# Altium PCB board2.PcbDoc
Units mm, origin at the board's own origin, x right, y up, seen from the top; angles counter-clockwise.
Board outline 65.53 x 63.88 mm, 2 copper layers (Top Layer, Bottom Layer), stack 1.66 mm thick; 40 components, 45 nets, 272 pads, 86 vias.
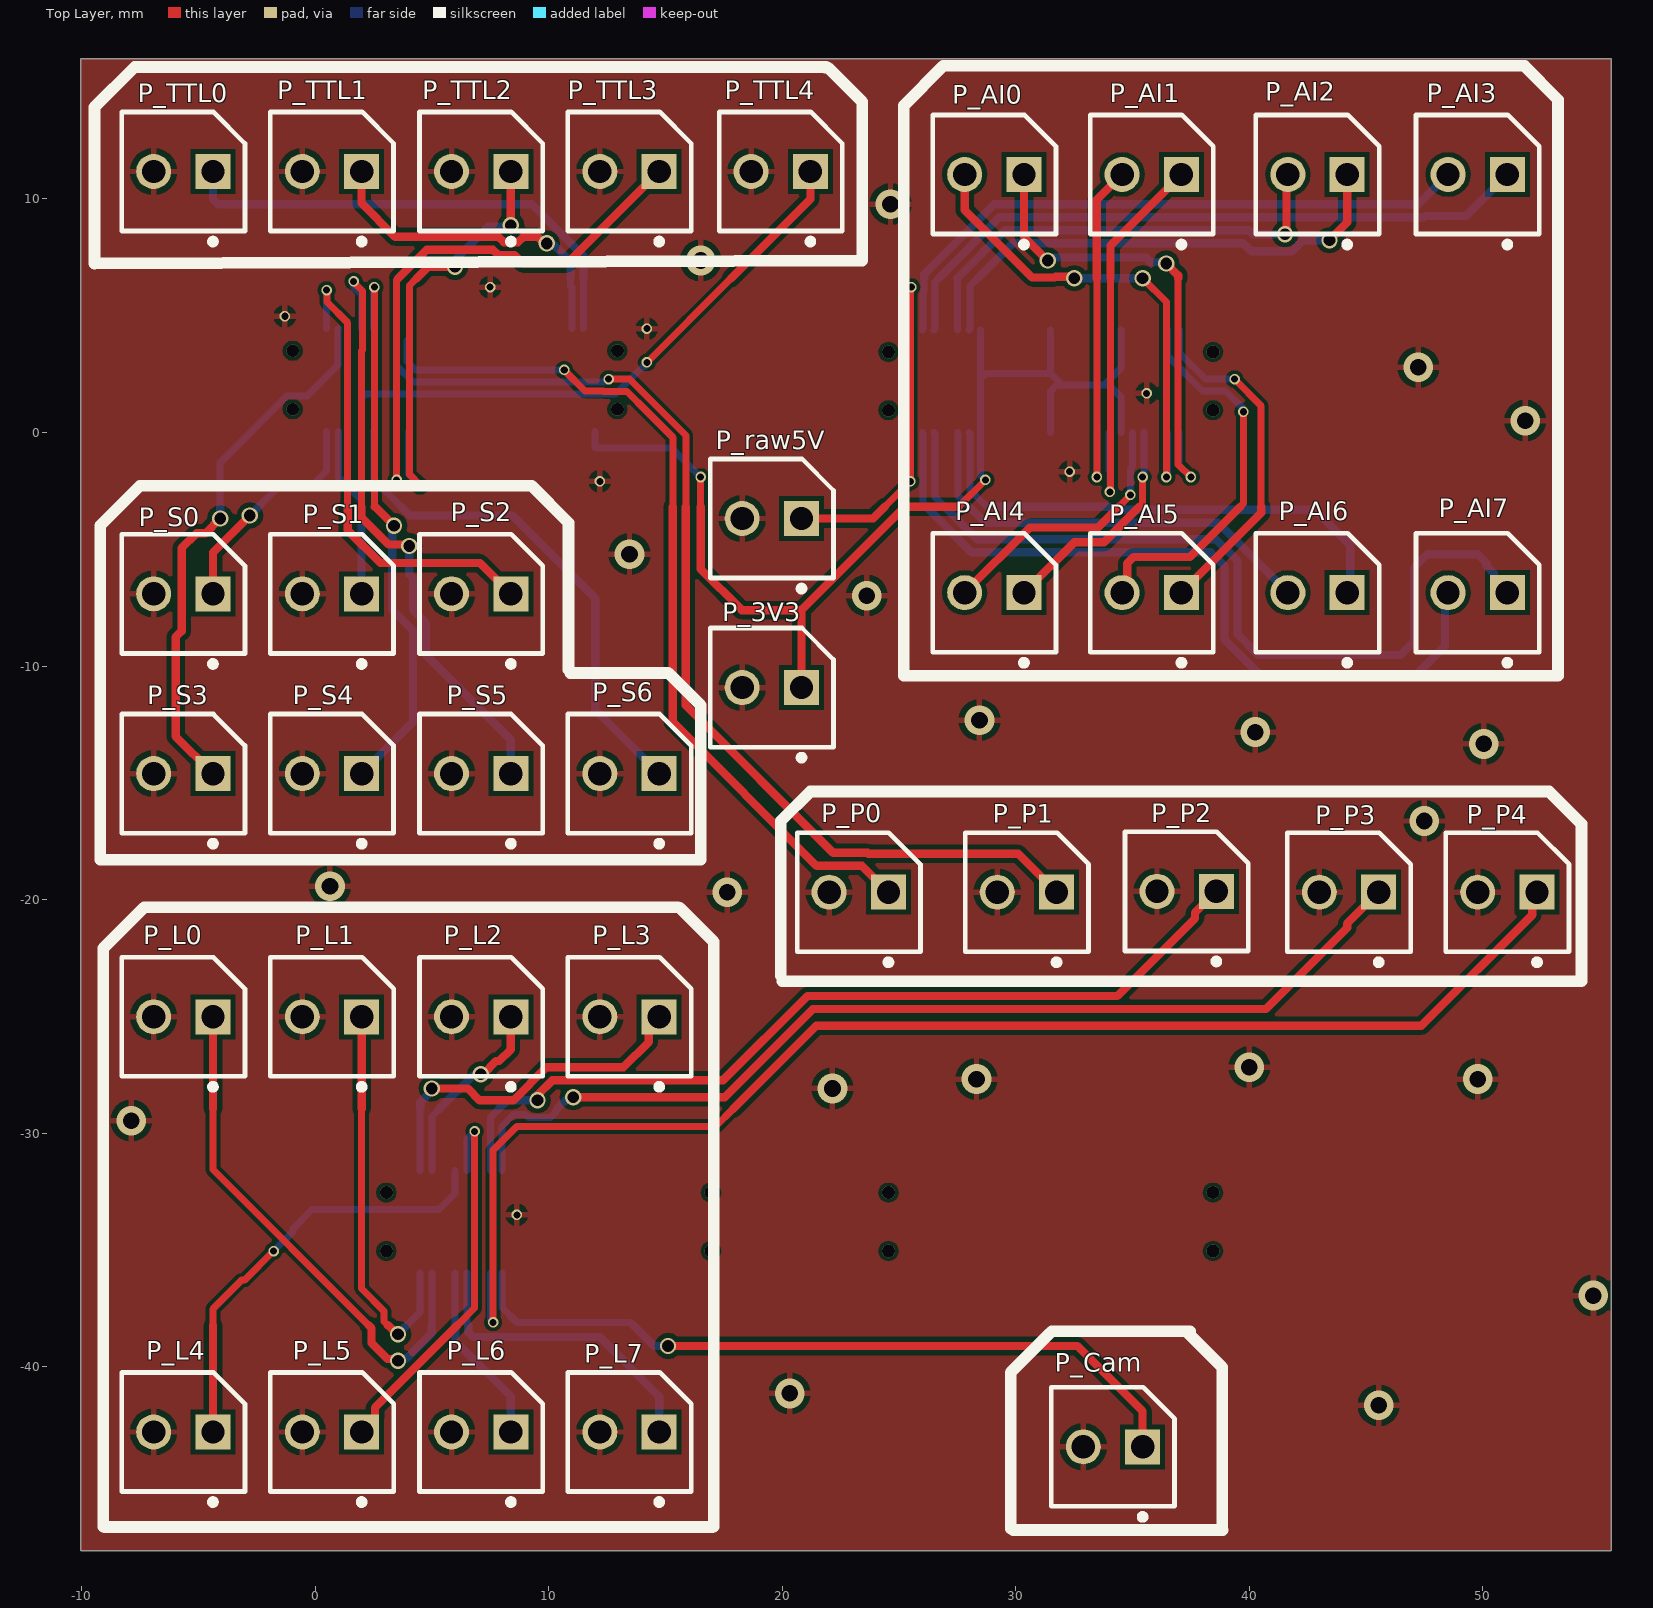
[diagram p0: Top Layer view]
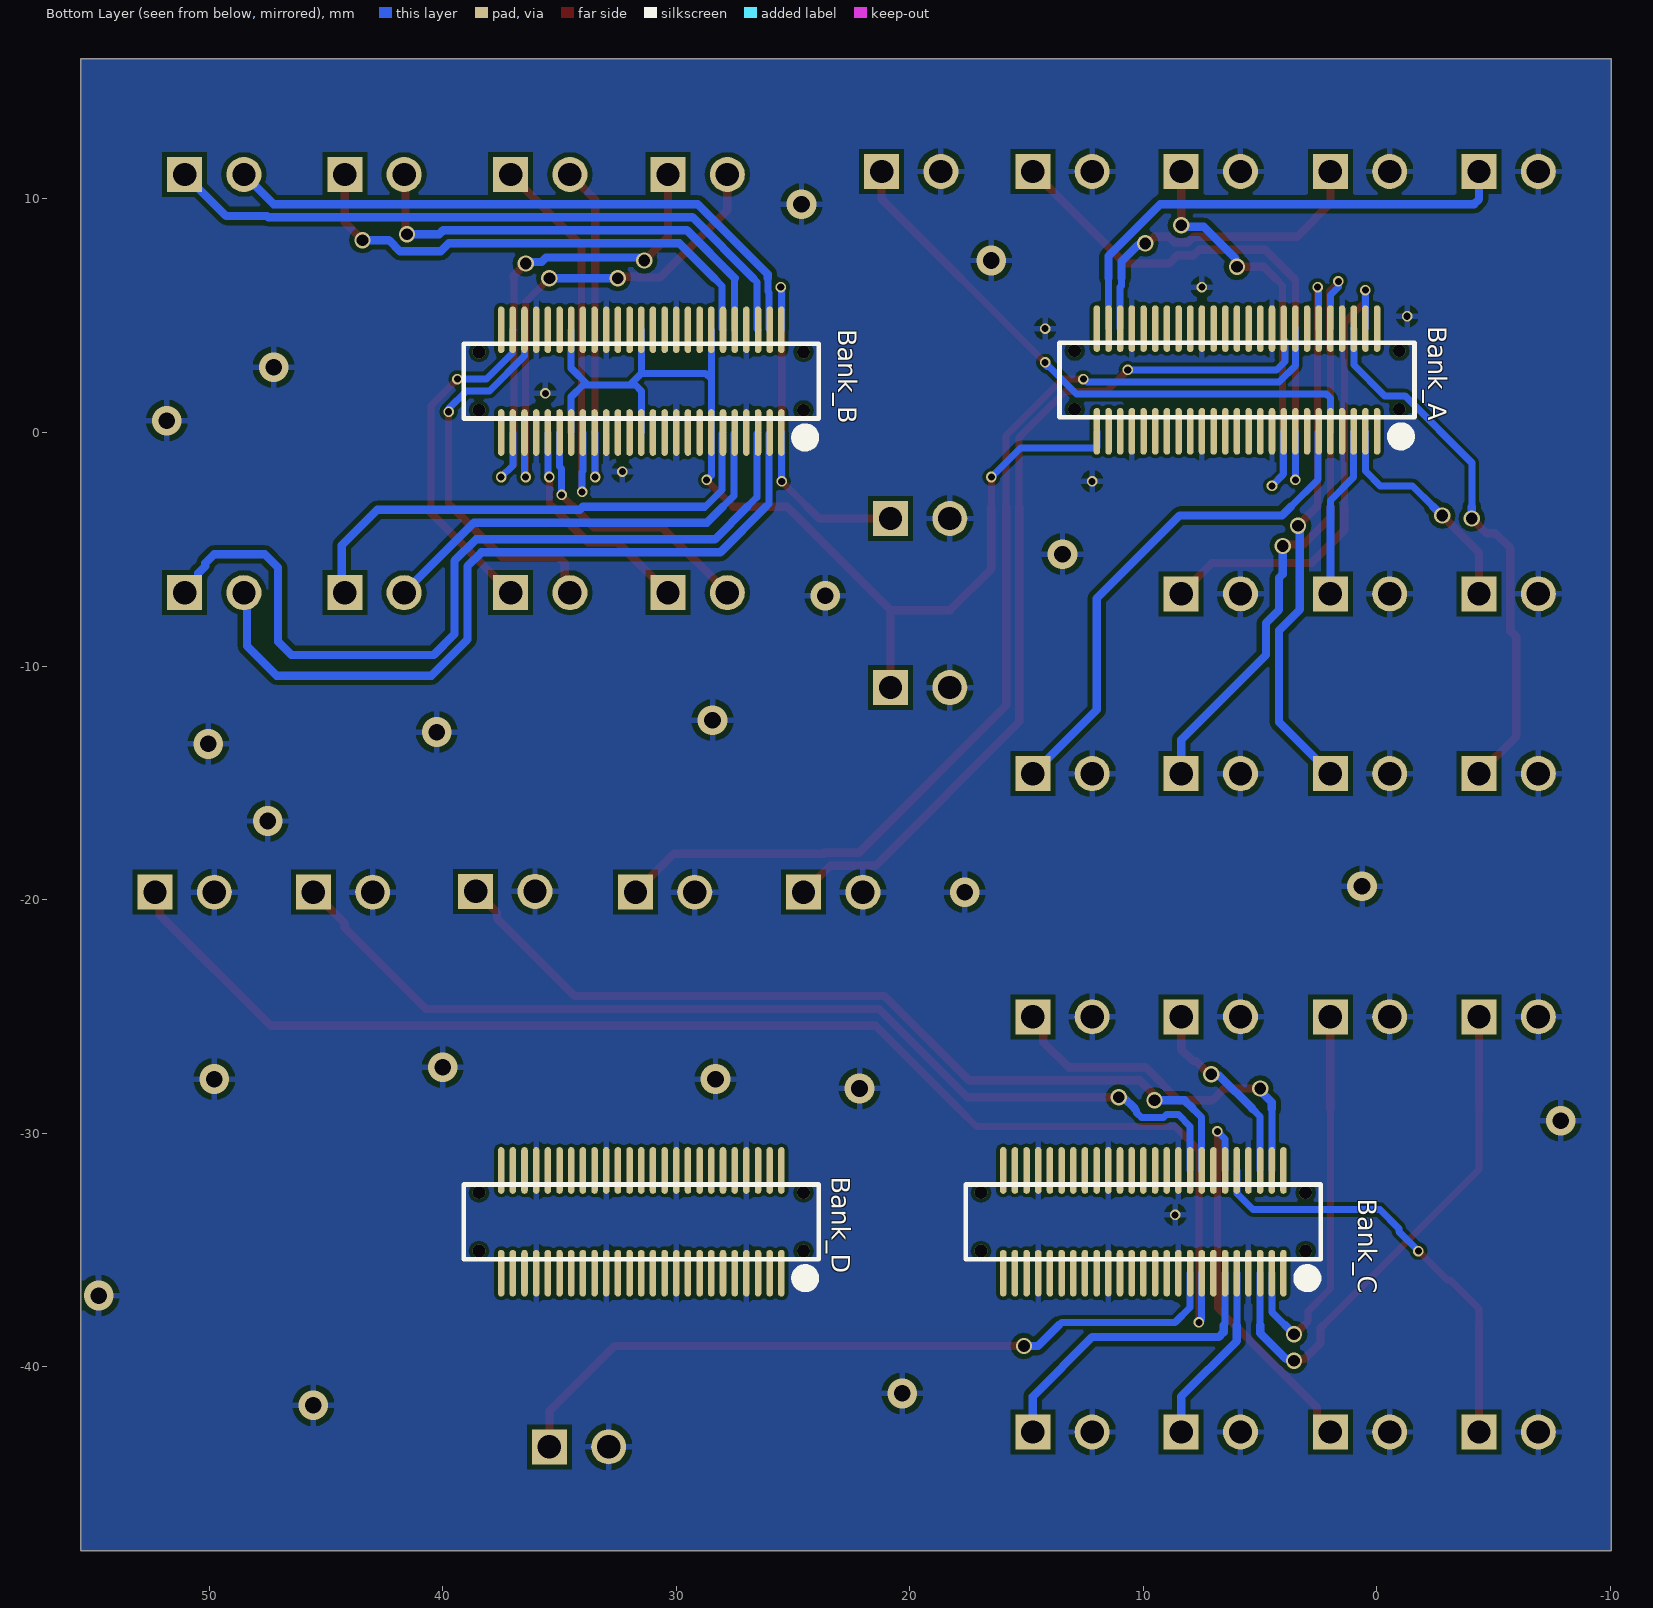
[diagram p1: Bottom Layer view, seen from below]
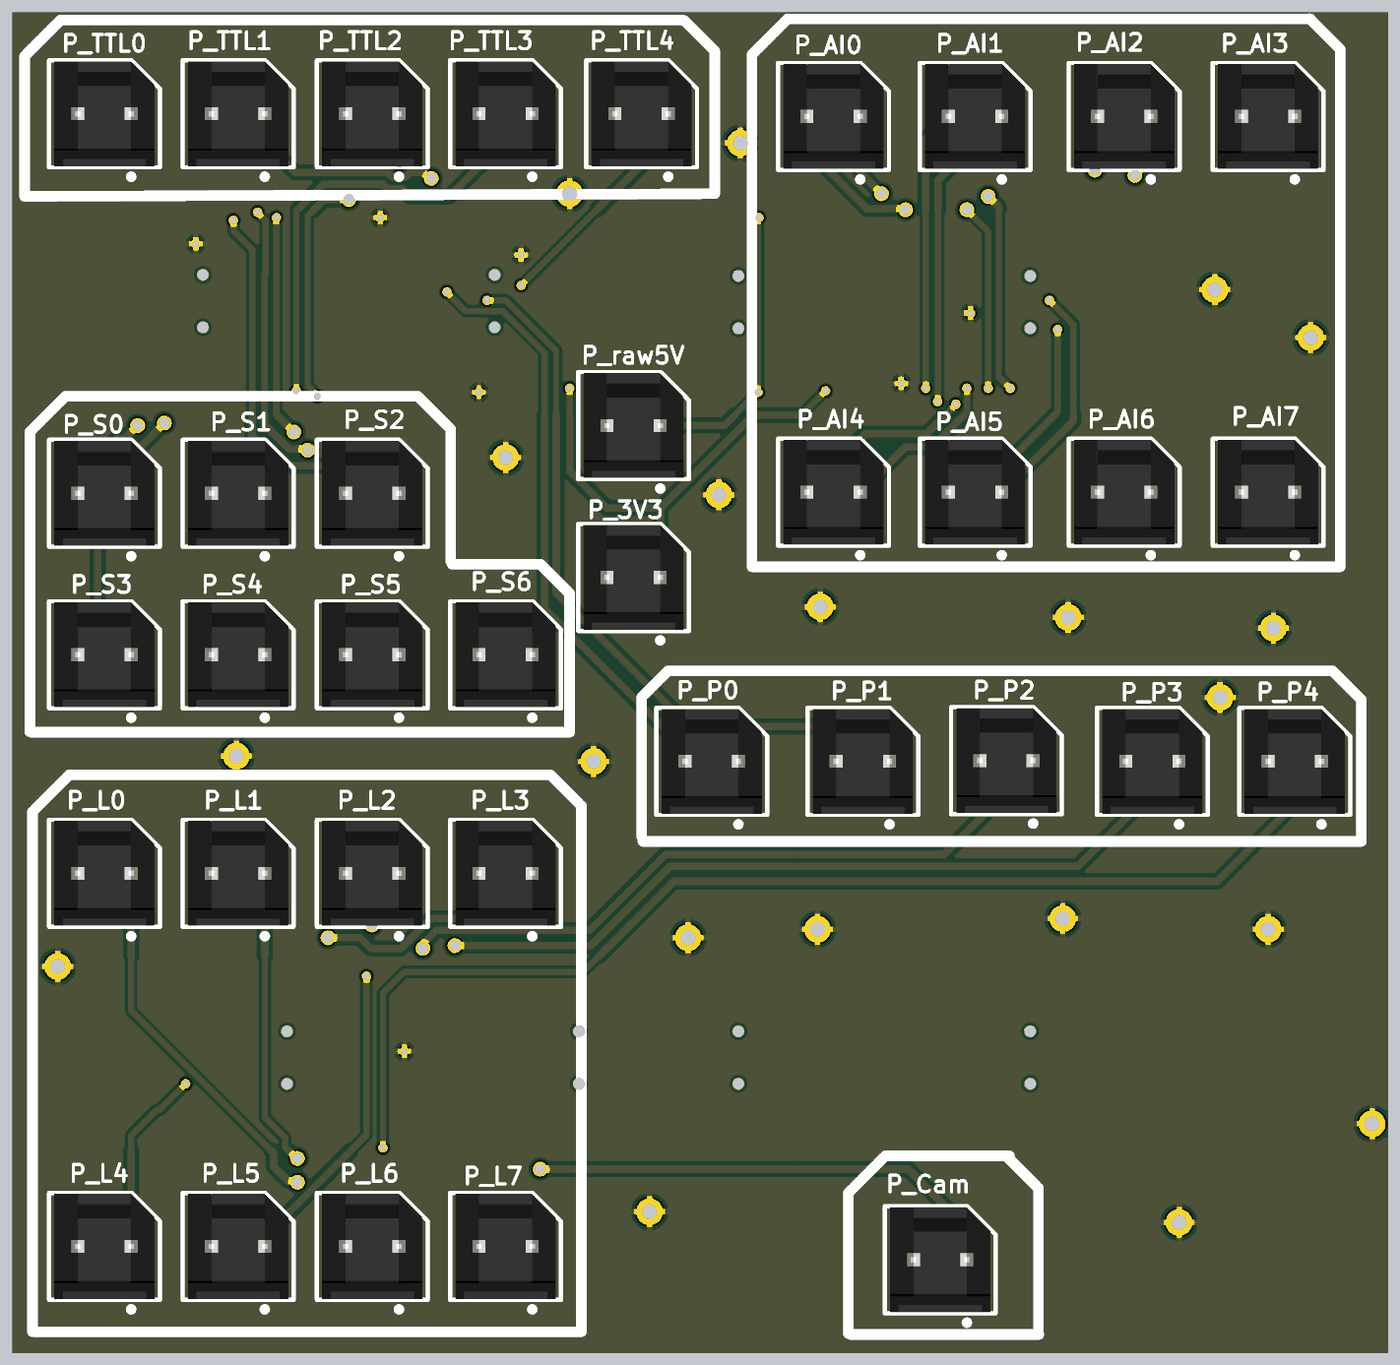
[diagram p2: 3D render of the assembled board from above, using the file's embedded part models]

## Layer stack, top to bottom
Top Solder: solder mask 0.0102, Solder Resist, Dk 3.5
Top Layer: signal copper 0.055
Dielectric1: dielectric 1.55, FR-4, Dk 4.8
Bottom Layer: signal copper 0.055
Bottom Solder: solder mask 0.0102, Solder Resist, Dk 3.5

## Board outline
-10.033,-47.879 -10.033,16.002 55.499,16.002 55.499,-47.879

## Design rules (kind name [scope] priority, off if disabled: settings)
Clearance clearance_polygons [InNamedPolygon('top_gnd_power')or InNamedPolygon('bottom_gnd_power') vs InNamedPolygon('top_gnd_uc')or InNamedPolygon('bottom_gnd_uc')] p1: gap=1.5 ignorepadtopadclearanceinfootprint=FALSE except(0: Arc-Hole Track-Hole SMDPad-Hole THPad-Hole Via-Hole Fill-Hole Poly-Hole Region-Hole Text-Hole)
Clearance ClearanceRoom [WithinRoom('less')  or WithinRoom('less1') or WithinRoom('less2') or WithinRoom('less3') or WithinRoom('less4')] p2: gap=0.15 ignorepadtopadclearanceinfootprint=FALSE
Clearance clearance_HP_class [InNetClass('high_power_net')] p3: gap=0.381 ignorepadtopadclearanceinfootprint=FALSE except(0: Arc-Hole Track-Hole SMDPad-Hole THPad-Hole Via-Hole Fill-Hole Poly-Hole Region-Hole Text-Hole)
Clearance "clearance_24V class" [InNetClass('24V_net')] p4: gap=0.254 ignorepadtopadclearanceinfootprint=FALSE except(0: Arc-Hole Track-Hole SMDPad-Hole THPad-Hole Via-Hole Fill-Hole Poly-Hole Region-Hole Text-Hole)
Clearance Clearance_1 [All] p5: gap=0.203 ignorepadtopadclearanceinfootprint=FALSE
FabricationTestPointUsage TestPointUsage [All] p1: valid=0 allowmultiple=FALSE
FabricationTestpoint Testpoint [All] p1: side=3 testpointundercomponent=TRUE minsize=1.016 maxsize=2.54 preferedsize=1.524 minholesize=0 maxholesize=1.016 preferedholesize=0.813 testpointgrid=0.025 allowsidetop=TRUE allowsidebottom=TRUE usegrid=TRUE gridtolerance=0
HoleSize [All] p1: absolutevalues=TRUE maxlimit=6 minlimit=0.025 maxpercent=80.000 minpercent=20.000
PolygonConnect PolygonConnect_Power [(InNet('+5V') OR InNet('-24VBUS'))] p1: connectstyle=Relief reliefconductorwidth=2.54 reliefentries=4 polygonreliefangle="90 Angle" airgapwidth=0.254
PolygonConnect [All] p2: connectstyle=Relief reliefconductorwidth=0.254 reliefentries=4 polygonreliefangle="90 Angle" airgapwidth=0.254
RoomDefinition less1 [False] p1: confinementstyle=ConfineIn formatcopy=TRUE lockcomponents=FALSE outline -6.731,-28.956 49.403,-28.956 49.403,-38.227 -6.731,-38.227
RoomDefinition less [False] p2: confinementstyle=ConfineIn formatcopy=TRUE lockcomponents=FALSE outline -8.763,6.604 45.593,6.604 45.593,-3.175 -8.763,-3.175
RoutingVias ViasRoom [WithinRoom('less')  or WithinRoom('less1') or WithinRoom('less2') or WithinRoom('less3') or WithinRoom('less4')] p1: holewidth=0.3 width=0.45 viastyle="Through Hole" minholewidth=0.3 minwidth=0.45 maxholewidth=0.3 maxwidth=0.45
RoutingVias [All] p2: holewidth=0.5 width=0.7 viastyle="Through Hole" minholewidth=0.3 minwidth=0.5 maxholewidth=0.711 maxwidth=1.27
SilkToSolderMaskClearance SilkscreenOverComponentPads [IsPad] p1: minsilkscreentomaskgap=0.254 clearancetoexposedcopper=TRUE
SolderMaskExpansion [All] p1: expansion=0.102 istentingtop=FALSE
Width WidthRoom [WithinRoom('less')  or WithinRoom('less1') or WithinRoom('less2') or WithinRoom('less3') or WithinRoom('less4')] p1: maxlimit=0.3 minlimit=0.3 preferedwidth=0.3
Width Width_HC_class [InNetClass('High_Current_net')] p2: maxlimit=15.24 minlimit=1.524 preferedwidth=1.524
Width Width_HP_class [InNetClass('High_Power_net')] p3: maxlimit=1.016 minlimit=1.016 preferedwidth=1.016
Width "Width_24V class" [InNetClass('24V_net')] p4: maxlimit=0.762 minlimit=0.762 preferedwidth=0.762
Width Width_1 [All] p5: maxlimit=0.356 minlimit=0.356 preferedwidth=0.356
26 further rules are at their usual default settings.

## Classes and differential pairs
component class Sheet1: Bank_C Bank_D P_Cam P_L0 P_L1 P_L2 P_L3 P_L4 P_L5 P_L6 P_L7 P_P2 P_P3 P_P4
component class sheet_top: Bank_A Bank_B P_3V3 P_AI0 P_AI1 P_AI2 P_AI3 P_AI4 P_AI5 P_AI6 P_AI7 P_P0 P_P1 P_raw5V P_S0 P_S1 P_S2 P_S3 P_S4 P_S5 P_S6 P_TTL0 P_TTL1 P_TTL2 P_TTL3 P_TTL4

## Components (designator, comment, footprint, x,y, rotation, side; value= is the part's Value field where it differs from the comment)
Bank_A "16890" SSOP50P500X600-50N 5.991,2.249 r270 bottom locked
Bank_B "16890" SSOP50P500X600-50N 31.5,2.2 r270 bottom locked
Bank_C "16890" SSOP50P500X600-50N 10,-33.8 r270 bottom locked
Bank_D "16890" SSOP50P500X600-50N 31.5,-33.8 r270 bottom locked
P_3V3 "66100211622" 66100211622 20.828,-10.922 r0 top
P_AI0 "66100211622" 66100211622 30.353,11.049 r0 top
P_AI1 "66100211622" 66100211622 37.096,11.049 r0 top
P_AI2 "66100211622" 66100211622 44.196,11.049 r0 top
P_AI3 "66100211622" 66100211622 51.054,11.049 r0 top
P_AI4 "66100211622" 66100211622 30.353,-6.858 r0 top
P_AI5 "66100211622" 66100211622 37.096,-6.858 r0 top
P_AI6 "66100211622" 66100211622 44.196,-6.858 r0 top
P_AI7 "66100211622" 66100211622 51.054,-6.858 r0 top
P_Cam "66100211622" 66100211622 35.433,-43.434 r0 top
P_L0 "66100211622" 66100211622 -4.375,-25.019 r0 top
P_L1 "66100211622" 66100211622 1.991,-25.019 r0 top
P_L2 "66100211622" 66100211622 8.382,-25.019 r0 top
P_L3 "66100211622" 66100211622 14.732,-25.019 r0 top
P_L4 "66100211622" 66100211622 -4.375,-42.799 r0 top
P_L5 "66100211622" 66100211622 1.991,-42.799 r0 top
P_L6 "66100211622" 66100211622 8.382,-42.799 r0 top
P_L7 "66100211622" 66100211622 14.732,-42.799 r0 top
P_P0 "66100211622" 66100211622 24.55,-19.685 r0 top
P_P1 "66100211622" 66100211622 31.75,-19.685 r0 top
P_P2 "66100211622" 66100211622 38.59,-19.65 r0 top
P_P3 "66100211622" 66100211622 45.54,-19.685 r0 top
P_P4 "66100211622" 66100211622 52.324,-19.685 r0 top
P_raw5V "66100211622" 66100211622 20.828,-3.683 r0 top
P_S0 "66100211622" 66100211622 -4.375,-6.91 r0 top
P_S1 "66100211622" 66100211622 1.99,-6.91 r0 top
P_S2 "66100211622" 66100211622 8.382,-6.91 r0 top
P_S3 "66100211622" 66100211622 -4.375,-14.605 r0 top
P_S4 "66100211622" 66100211622 1.99,-14.605 r0 top
P_S5 "66100211622" 66100211622 8.382,-14.605 r0 top
P_S6 "66100211622" 66100211622 14.732,-14.605 r0 top
P_TTL0 "66100211622" 66100211622 -4.375,11.176 r0 top
P_TTL1 "66100211622" 66100211622 1.99,11.176 r0 top
P_TTL2 "66100211622" 66100211622 8.382,11.176 r0 top
P_TTL3 "66100211622" 66100211622 14.732,11.176 r0 top
P_TTL4 "66100211622" 66100211622 21.209,11.176 r0 top

## Footprints (in the part's own frame and the unit in brackets; to place one, negate y for a bottom-side part, rotate by r counter-clockwise, add the part's x,y. Pads: shape width x height; smd on the part's side, far side on the other; paste and mask are expansions set on the pad)
66100211622 [mm] "2 Pins, stehend 2.54mm Intercom Stiftleiste WR-WTB"
  rect 1.5x1.5 hole 1: 1(0,0)
  round 1.5 hole 1: 2(-2.54,0)
  silkscreen extent -3.91,-3.12 1.37,2.55, body extent -3.66,-2.5 1.12,2.5, height 11.33
SSOP50P500X600-50N [mm] "SSOP, 50-Leads, Body 15,20x4,00mm, Pitch 0,50mm, IPC Medium Density"
  oval 2x0.28 smd: 1(2.2,6) 2(2.2,5.5) 3(2.2,5) 4(2.2,4.5) 5(2.2,4) 6(2.2,3.5) 7(2.2,3) 8(2.2,2.5) 9(2.2,2) 10(2.2,1.5) 11(2.2,1) 12(2.2,0.5) 13(2.2,0) 14(2.2,-0.5) 15(2.2,-1) 16(2.2,-1.5) 17(2.2,-2) 18(2.2,-2.5) 19(2.2,-3) 20(2.2,-3.5) 21(2.2,-4) 22(2.2,-4.5) 23(2.2,-5) 24(2.2,-5.5) 25(2.2,-6) 26(-2.2,-6) 27(-2.2,-5.5) 28(-2.2,-5) 29(-2.2,-4.5) 30(-2.2,-4) 31(-2.2,-3.5) 32(-2.2,-3) 33(-2.2,-2.5) 34(-2.2,-2) 35(-2.2,-1.5) 36(-2.2,-1) 37(-2.2,-0.5) 38(-2.2,0) 39(-2.2,0.5) 40(-2.2,1) 41(-2.2,1.5) 42(-2.2,2) 43(-2.2,2.5) 44(-2.2,3) 45(-2.2,3.5) 46(-2.2,4) 47(-2.2,4.5) 48(-2.2,5) 49(-2.2,5.5) 50(-2.2,6)
  silkscreen extent -1.6,-7.6 2.71,7.6, body extent -2,-6.48 2,6.48, height 6

## Part data
Bank_A Bank_B Bank_C Bank_D: library part CMP-00541-6, "Board to Board Double Slot Femal 50 PIN", Manufacturer=Sparkfun, PartNumber=PRT-16890
P_3V3 P_AI0 P_AI1 P_AI2 P_AI3 P_AI4 P_AI5 P_AI6 P_AI7 P_Cam P_L0 P_L1 P_L2 P_L3 P_L4 P_L5 P_L6 P_L7 P_P0 P_P1 P_P2 P_P3 P_P4 P_raw5V P_S0 P_S1 P_S2 P_S3 P_S4 P_S5 P_S6 P_TTL0 P_TTL1 P_TTL2 P_TTL3 P_TTL4: library part CMP-001-0161-A.3, "WR-WTB 2.54 mm Male Vertical Shrouded Header 2 Pins", Manufacturer="Wurth Electronics", Supplier Part Number=732-14102-ND, PartNumber=66100211622, Supplier=Digi-Key

## Via types
v1: diameter 0.45, hole 0.3, Top Layer to Bottom Layer, 30 vias
v2: diameter 0.7, hole 0.5, Top Layer to Bottom Layer, 20 vias
v3: diameter 1.27, hole 0.711, Top Layer to Bottom Layer, 20 vias
v4: diameter 0.55/0.55 (per signal layer), hole 0.55, Top Layer to Bottom Layer, 16 vias

## Nets (pads, with @x,y where several pads share a name; then routed paths per layer and width w, separated by ;. In a path a pad name is that pad's centre, name@x,y a point inside that pad or via, vN(x,y) a via of type N, cw(c..) or ccw(c..) an arc to the next point about the centre after c; other vN are vias at no path point)
+3V3: Bank_A.25 Bank_B.7 Bank_B.13 Bank_B.19 Bank_B.32 Bank_B.38 Bank_B.44 P_3V3.1 | length 49.7
  Top Layer w0.3: 16.51,-3.175 v1(16.51,-1.905) ; 27.559,-3.175 v1(28.702,-2.032)
  Top Layer w0.356: 16.51,-3.175 16.51,-5.842 18.275,-7.607 20.828,-7.607 ; P_3V3.1 20.828,-7.607 ; 27.559,-3.175 25.26,-3.175 20.828,-7.607
  Bottom Layer w0.3: Bank_A.25 11.991,-0.651 12.001,-0.661 15.266,-0.661 v1(16.51,-1.905) ; Bank_B.44 28.5,2.286 ; v1(28.702,-2.032) 28.5,-1.83 Bank_B.7 28.5,2.286 ; Bank_B.13 31.5,1.782 31.75,2.032 32,2.032 ; Bank_B.38 31.5,2.532 ; Bank_B.19 34.5,1.532 34,2.032 33.782,2.032 ; Bank_B.32 34.5,2.75 33.782,2.032 ; 28.5,2.286 28.746,2.532 31.5,2.532 ; 31.5,2.532 32,2.032 ; 32,2.032 33.782,2.032
+5V: Bank_B.1 Bank_B.50 P_raw5V.1 | length 17.6
  Top Layer w0.3: 24.403,-3.175 v1(25.484,-2.094) 25.484,6.14 25.527,6.183 v1(25.527,6.223)
  Top Layer w0.356: P_raw5V.1 23.895,-3.683 24.403,-3.175
  Bottom Layer w0.3: v1(25.484,-2.094) 25.492,-2.086 Bank_B.1@25.492,-0.85 ; Bank_B.1@25.5,-0.85 Bank_B.1 ; Bank_B.50 25.5,6.196 v1(25.527,6.223)
GND: Bank_A.4 Bank_A.10 Bank_A.16 Bank_A.22 Bank_A.29 Bank_A.35 Bank_A.41 Bank_A.47 Bank_B.4 Bank_B.10 Bank_B.16 Bank_B.22 Bank_B.29 Bank_B.35 Bank_B.41 Bank_B.47 Bank_C.4 Bank_C.10 Bank_C.16 Bank_C.22 Bank_C.29 Bank_C.35 Bank_C.41 Bank_C.47 Bank_D.4 Bank_D.10 Bank_D.16 Bank_D.22 Bank_D.29 Bank_D.35 Bank_D.41 Bank_D.47 P_3V3.2 P_Cam.2 P_L0.2 P_L1.2 P_L2.2 P_L3.2 P_L4.2 P_L5.2 P_L6.2 P_L7.2 P_P0.2 P_P1.2 P_P2.2 P_P3.2 P_P4.2 P_raw5V.2 P_S0.2 P_S1.2 P_S2.2 P_S3.2 P_S4.2 P_S5.2 P_S6.2 P_TTL0.2 P_TTL1.2 P_TTL2.2 P_TTL3.2 P_TTL4.2
  other v1: 8.636,-33.503 12.192,-2.094 32.309,-1.676 35.611,1.676 14.207,4.449 -1.295,4.978 7.491,6.223
  other v3: 45.54,-41.656 20.32,-41.148 54.737,-36.957 -7.874,-29.464 22.153,-28.088 28.321,-27.686 49.784,-27.686 40.005,-27.178 17.653,-19.685 0.635,-19.431 47.498,-16.637 50.038,-13.335 40.259,-12.827 28.448,-12.319 23.622,-6.985 13.462,-5.207 51.816,0.508 47.244,2.794 16.51,7.366 24.638,9.779
NetBank_A_2: Bank_A.2 P_S0.1 | length 9.8
  Top Layer w0.356: P_S0.1 -4.375,-5.137 v2(-2.794,-3.556)
  Bottom Layer w0.3: -2.413,-3.175 -1.524,-2.286 -0.144,-2.286 0.491,-1.651 Bank_A.2
  Bottom Layer w0.356: v2(-2.794,-3.556) -2.413,-3.175
NetBank_A_3: Bank_A.3 P_S1.1 | length 7.4
  Bottom Layer w0.3: Bank_A.3 0.991,-1.913 1.99,-2.912 1.99,-3.175
  Bottom Layer w0.356: P_S1.1 1.99,-3.175
NetBank_A_5: Bank_A.5 P_TTL4.1 | length 25.4
  Top Layer w0.3: v1(14.207,3) 17.81,6.604
  Top Layer w0.356: 17.81,6.604 21.209,10.003 P_TTL4.1
  Bottom Layer w0.3: Bank_A.5 1.991,1.475 2.167,1.651 12.857,1.651 v1@14.083,2.877 ; v1@14.132,2.829 14.132,2.885 14.207,2.96 v1(14.207,3)
NetBank_A_6: Bank_A.6 P_S6.1 | length 22.3
  Bottom Layer w0.3: Bank_A.6 2.529,0.011 2.529,-2.021 3.683,-3.175
  Bottom Layer w0.356: 3.683,-3.175 4.064,-3.556 8.444,-3.556 12,-7.112 12,-11.873 P_S6.1
NetBank_A_8: Bank_A.8 P_TTL3.1 | length 24.3
  Top Layer w0.3: v1(3.491,-2.032) 3.491,6.539 3.556,6.604
  Top Layer w0.356: 3.556,6.604 4.775,7.823 7.617,7.823 7.848,7.592 8.537,7.592 8.89,7.239 10.795,7.239 P_TTL3.1
  Bottom Layer w0.3: v1(3.491,-2.032) Bank_A.8
NetBank_A_9: Bank_A.9 P_TTL2.1 | length 19.2
  Top Layer w0.3: 4.346,6.604 4.033,6.291 4.033,-1.789 4.491,-2.247 v1(4.491,-2.286)
  Top Layer w0.356: 4.346,6.604 4.834,7.092 v2(5.991,7.092) ; v2(8.382,8.882) P_TTL2.1
  Bottom Layer w0.3: Bank_A.9 3.991,-1.786 v1(4.491,-2.286)
  Bottom Layer w0.356: v2(5.991,7.092) 6.057,7.158 6.057,7.454 7.419,8.816 8.316,8.816 v2(8.382,8.882)
NetBank_A_27: Bank_A.27 P_TTL0.1 | length 21.2
  Bottom Layer w0.3: Bank_A.27 11.491,6.604
  Bottom Layer w0.356: P_TTL0.1 -4.375,9.987 -4.167,9.779 9.271,9.779 11.491,7.559 11.491,6.604
NetBank_A_28: Bank_A.28 P_TTL1.1 | length 14.4
  Top Layer w0.356: P_TTL1.1 1.99,9.821 3.429,8.382 7.848,8.382 8.079,8.151 8.685,8.151 8.916,8.382 9.541,8.382 9.826,8.097 v2(9.919,8.097)
  Bottom Layer w0.3: 10.932,6.604 10.932,6.285 10.991,6.226 Bank_A.28
  Bottom Layer w0.356: v2(9.919,8.097) 9.985,8.031 10.229,8.031 10.932,7.328 10.932,6.604
NetBank_A_42: Bank_A.42 P_P0.1 | length 38.1
  Top Layer w0.3: v1(10.668,2.684) 10.668,2.667 11.557,1.778 12.339,1.778 12.356,1.761 13.351,1.761 14.244,0.868 15.316,-0.205 15.316,-3.175
  Top Layer w0.356: 15.316,-3.175 15.316,-12.395 21.475,-18.554 23.419,-18.554 P_P0.1
  Bottom Layer w0.3: Bank_A.42@3.941,3.937 3.941,3.045 4.302,2.684 v1(10.668,2.684)
NetBank_A_43: Bank_A.43 P_P1.1 | length 46.1
  Top Layer w0.3: v1(12.573,2.286) 13.462,2.286 15.875,-0.127 15.875,-3.175
  Top Layer w0.356: 15.875,-3.175 15.875,-11.684 22.186,-17.995 23.65,-17.995 23.689,-18.034 30.099,-18.034 P_P1.1
  Bottom Layer w0.3: Bank_A.43 3.491,2.859 4.191,2.159 12.405,2.159 12.532,2.286 v1(12.573,2.286)
NetBank_A_45: Bank_A.45 P_S4.1 | length 24.3
  Top Layer w0.3: 2.54,-3.156 2.54,6.222 v1(2.541,6.223)
  Top Layer w0.356: 2.559,-3.175 v2(3.375,-3.991)
  Bottom Layer w0.3: Bank_A.45 2.491,6.132 2.541,6.183 v1(2.541,6.223)
  Bottom Layer w0.356: P_S4.1 4.191,-12.404 4.191,-8.471 3.302,-7.582 3.302,-4.554 3.309,-4.547 3.309,-4.057 v2(3.375,-3.991)
NetBank_A_46: Bank_A.46 P_S5.1 | length 26.6
  Top Layer w0.3: v1(1.651,6.477) 1.651,6.436 2.032,6.055 2.032,3.541 1.99,3.499 1.99,-3.175
  Top Layer w0.356: 1.99,-3.175 1.99,-3.64 3.15,-4.799 3.975,-4.799 v2(4.033,-4.857)
  Bottom Layer w0.3: v1(1.651,6.477) 1.651,6.223 1.991,5.883 Bank_A.46
  Bottom Layer w0.356: v2(4.033,-4.857) 4.033,-6.065 4.191,-6.223 4.191,-7.595 4.75,-8.153 4.75,-9.525 8.382,-13.157 P_S5.1
NetBank_A_48: Bank_A.48 P_S3.1 | length 23.3
  Top Layer w0.356: P_S3.1 -5.969,-13.011 -5.969,-8.763 -5.715,-8.509 -5.715,-4.953 -5.08,-4.318 -4.699,-4.318 v2(-4.064,-3.683)
  Bottom Layer w0.3: -4.064,-3.175 -4.064,-1.293 -1.197,1.574 -0.331,1.574 0.981,2.886 0.981,4.439 Bank_A.48
  Bottom Layer w0.356: v2(-4.064,-3.683) -4.064,-3.175
NetBank_A_49: Bank_A.49 P_S2.1 | length 20.4
  Top Layer w0.3: v1(0.491,6.096) 0.508,6.079 0.508,5.588 1.397,4.699 1.397,-3.175
  Top Layer w0.356: 1.397,-3.175 1.397,-4.191 2.794,-5.588 7.06,-5.588 P_S2.1
  Bottom Layer w0.3: Bank_A.49 v1(0.491,6.096)
NetBank_B_2: Bank_B.2 P_AI7.2 | length 33.2
  Bottom Layer w0.3: Bank_B.2 26.038,-0.038 26.038,-3.051 26.162,-3.175
  Bottom Layer w0.356: 26.162,-3.175 28.118,-5.131 38.348,-5.131 38.938,-5.721 38.938,-8.867 40.485,-10.414 47.117,-10.414 48.387,-9.144 48.387,-6.985 P_AI7.2
NetBank_B_3: Bank_B.3 P_AI7.1 | length 36.5
  Bottom Layer w0.3: Bank_B.3 26.538,-0.038 26.538,-2.789 26.566,-2.789 26.952,-3.175
  Bottom Layer w0.356: 26.952,-3.175 28.349,-4.572 38.58,-4.572 39.497,-5.489 39.497,-8.636 40.386,-9.525 46.482,-9.525 47.054,-8.954 47.054,-5.779 47.625,-5.207 49.784,-5.207 50.165,-5.588 50.165,-5.715 50.482,-6.032 50.482,-6.286 P_AI7.1
NetBank_B_5: Bank_B.5 P_AI6.2 | length 18.6
  Bottom Layer w0.3: Bank_B.5 27.538,-0.038 27.538,-2.713 28,-3.175
  Bottom Layer w0.356: 28,-3.175 28.686,-3.861 38.659,-3.861 P_AI6.2
NetBank_B_6: Bank_B.6 P_AI6.1 | length 21.8
  Bottom Layer w0.3: Bank_B.6 28.038,-0.038 28.038,-2.459 28.754,-3.175
  Bottom Layer w0.356: 28.79,-3.175 34.002,-3.175 34.129,-3.302 42.799,-3.302 44.323,-4.826 44.323,-6.731 P_AI6.1
NetBank_B_17: Bank_B.17 P_AI1.2 | length 15.3
  Top Layer w0.3: v1(33.475,-1.905) 33.475,6.604
  Top Layer w0.356: 33.475,6.604 33.475,9.968 P_AI1.2
  Bottom Layer w0.3: v1(33.475,-1.905) 33.49,-1.89 33.49,-0.01 Bank_B.17
NetBank_B_18: Bank_B.18 P_AI1.1 | length 17.4
  Top Layer w0.3: v1(34.036,-2.54) 34.059,-2.517 34.059,6.604
  Top Layer w0.356: 34.059,6.604 34.059,8.012 P_AI1.1
  Bottom Layer w0.3: Bank_B.18 34,-1.648 34.036,-1.684 v1(34.036,-2.54)
NetBank_B_20: Bank_B.20 P_AI4.2 | length 11.5
  Top Layer w0.3: 34.417,-3.175 34.908,-2.684 v1(34.908,-2.667)
  Top Layer w0.356: P_AI4.2 30.607,-4.064 33.528,-4.064 34.417,-3.175
  Bottom Layer w0.3: v1(34.908,-2.667) 34.908,-1.542 35,-1.45 Bank_B.20
NetBank_B_21: Bank_B.21 P_AI4.1 | length 9.7
  Top Layer w0.3: 35.306,-3.175 35.433,-3.048 v1(35.433,-1.905)
  Top Layer w0.356: P_AI4.1 32.512,-4.699 33.782,-4.699 35.306,-3.175
  Bottom Layer w0.3: v1(35.433,-1.905) 35.433,-1.864 35.5,-1.797 Bank_B.21
NetBank_B_23: Bank_B.23 P_AI0.2 | length 21.1
  Top Layer w0.3: v2(35.433,6.604) 36.449,5.588 v1(36.449,-1.905)
  Top Layer w0.356: P_AI0.2 27.813,9.525 30.703,6.635 31.672,6.635 31.707,6.67 32.446,6.67 v2(32.512,6.604)
  Bottom Layer w0.3: v1(36.449,-1.905) 36.449,-1.864 36.5,-1.813 Bank_B.23
  Bottom Layer w0.356: v2(32.512,6.604) v2@35.306,6.604
NetBank_B_24: Bank_B.24 P_AI0.1 | length 21
  Top Layer w0.3: 36.957,6.604 36.957,-1.362 v1(37.5,-1.905)
  Top Layer w0.356: P_AI0.1 30.353,8.382 v2(31.369,7.366) ; v2(36.449,7.239) 36.957,6.731 36.957,6.604
  Bottom Layer w0.3: Bank_B.24 37,-1.405 v1(37.5,-1.905)
  Bottom Layer w0.356: v2(31.369,7.366) 31.462,7.366 31.589,7.493 35.578,7.493 35.766,7.305 36.383,7.305 v2(36.449,7.239)
NetBank_B_27: Bank_B.27 P_AI5.1 | length 14.9
  Top Layer w0.3: v1(39.37,2.286) 40.513,1.143 40.513,-3.175
  Top Layer w0.356: P_AI5.1 40.513,-3.441 40.513,-3.175
  Bottom Layer w0.3: Bank_B.27 37.01,4.39 37.01,3.408 38.132,2.286 v1(39.37,2.286)
NetBank_B_28: Bank_B.28 P_AI5.2 | length 16.7
  Top Layer w0.3: 39.624,-3.175 39.751,-3.048 v1(39.751,0.889)
  Top Layer w0.356: P_AI5.2 34.775,-6.639 34.775,-5.611 35.052,-5.334 37.465,-5.334 39.624,-3.175
  Bottom Layer w0.3: Bank_B.28 36.51,4.39 36.51,3.271 38.003,1.778 38.989,1.778 39.751,1.016 v1(39.751,0.889)
NetBank_B_45: Bank_B.45 P_AI2.1 | length 21.5
  Top Layer w0.356: v2(43.434,8.235) 44.196,8.997 P_AI2.1
  Bottom Layer w0.3: Bank_B.45 28.038,4.438 28.038,6.277 28.365,6.604
  Bottom Layer w0.356: 28.365,6.604 29.864,8.103 39.748,8.103 40.093,7.758 41.832,7.758 42.309,8.235 v2(43.434,8.235)
NetBank_B_46: Bank_B.46 P_AI2.2 | length 19.8
  Top Layer w0.356: v2(41.529,8.489) 41.593,8.553 41.593,10.986 P_AI2.2
  Bottom Layer w0.3: Bank_B.46 27.5,6.604
  Bottom Layer w0.356: 27.5,6.604 27.5,6.615 29.546,8.661 39.98,8.661 40.152,8.489 v2(41.529,8.489)
NetBank_B_48: Bank_B.48 P_AI3.1 | length 28.5
  Bottom Layer w0.3: Bank_B.48 26.538,4.438 26.538,6.444 26.698,6.604
  Bottom Layer w0.356: 26.698,6.604 29.314,9.22 47.475,9.22 47.526,9.271 49.276,9.271 P_AI3.1
NetBank_B_49: Bank_B.49 P_AI3.2 | length 26.6
  Bottom Layer w0.3: Bank_B.49 26.038,4.438 26.038,5.992 26.08,6.034 26.08,6.604
  Bottom Layer w0.356: 26.08,6.604 26.08,6.776 29.083,9.779 47.244,9.779 P_AI3.2
NetBank_C_2: Bank_C.2 P_L1.1 | length 17.3
  Top Layer w0.3: 1.991,-28.956 1.991,-36.662 2.957,-37.628 2.957,-38.072 3.112,-38.227
  Top Layer w0.356: 1.991,-28.956 P_L1.1 ; 3.112,-38.227 3.493,-38.608 v2(3.547,-38.608)
  Bottom Layer w0.3: 3.928,-38.227 4.5,-37.655 Bank_C.2
  Bottom Layer w0.356: v2(3.547,-38.608) 3.928,-38.227
NetBank_C_3: Bank_C.3 P_L0.1 | length 22.7
  Top Layer w0.3: -4.375,-28.956 -4.375,-31.566 2.286,-38.227
  Top Layer w0.356: -4.375,-28.956 P_L0.1 ; 2.286,-38.227 2.415,-38.356 2.415,-38.991 3.1,-39.676 3.481,-39.676 v2(3.547,-39.742)
  Bottom Layer w0.3: 5,-38.227 Bank_C.3
  Bottom Layer w0.356: v2(3.547,-39.742) 3.613,-39.676 3.885,-39.676 5,-38.561 5,-38.227
NetBank_C_5: Bank_C.5 P_L6.1 | length 7.8
  Bottom Layer w0.3: 6,-38.227 Bank_C.5
  Bottom Layer w0.356: 6,-38.227 6,-38.893 8.382,-41.275 P_L6.1
NetBank_C_6: Bank_C.6 P_L7.1 | length 13.4
  Bottom Layer w0.3: Bank_C.6 6.5,-38.168 6.559,-38.227
  Bottom Layer w0.356: 6.559,-38.227 6.559,-38.527 6.767,-38.735 12.192,-38.735 14.732,-41.275 P_L7.1
NetBank_C_8: Bank_C.8 P_P4.1 | length 59.2
  Top Layer w0.3: v1(7.62,-38.1) 7.62,-30.734 8.636,-29.718 17.145,-29.718 17.907,-28.956
  Top Layer w0.356: 17.907,-28.956 21.463,-25.4 47.371,-25.4 52.121,-20.65 52.121,-19.888 P_P4.1
  Bottom Layer w0.3: Bank_C.8 7.5,-37.98 v1(7.62,-38.1)
NetBank_C_9: Bank_C.9 P_Cam.1 | length 32.3
  Top Layer w0.356: v2(15.113,-39.116) 32.639,-39.116 35.433,-41.91 P_Cam.1
  Bottom Layer w0.3: Bank_C.9 8,-37.464 8.636,-38.1 13.492,-38.1 13.619,-38.227
  Bottom Layer w0.356: 13.619,-38.227 14.508,-39.116 v2(15.113,-39.116)
NetBank_C_42: Bank_C.42 P_P3.1 | length 43.8
  Top Layer w0.356: v2(11.049,-28.468) 17.534,-28.468 21.313,-24.689 40.716,-24.689 44.196,-21.209 44.196,-21.029 P_P3.1
  Bottom Layer w0.3: Bank_C.42 8,-29.71 8.5,-29.21 9.017,-29.21 9.144,-29.337 10.079,-29.337 10.287,-29.129 10.287,-29.034 10.365,-28.956
  Bottom Layer w0.356: 10.365,-28.956 10.853,-28.468 v2(11.049,-28.468)
NetBank_C_43: Bank_C.43 P_P2.1 | length 37.6
  Top Layer w0.356: v2(9.521,-28.596) 9.521,-28.375 10.16,-27.737 17.475,-27.737 21.082,-24.13 34.349,-24.13 37.677,-20.802 37.677,-20.563 P_P2.1
  Bottom Layer w0.3: Bank_C.43 7.5,-29.33 7.874,-28.956
  Bottom Layer w0.356: 7.874,-28.956 8.234,-28.596 v2(9.521,-28.596)
NetBank_C_45: Bank_C.45 P_L5.1 | length 16.7
  Top Layer w0.3: 6.096,-38.227 6.833,-37.49 v1(6.833,-29.921)
  Top Layer w0.356: P_L5.1 2.563,-42.227 2.563,-41.76 6.096,-38.227
  Bottom Layer w0.3: Bank_C.45 6.5,-30.254 v1(6.833,-29.921)
NetBank_C_46: Bank_C.46 P_L4.1 | length 18.8
  Top Layer w0.3: -4.375,-38.227 -4.375,-37.522 -3.153,-36.3 -3.028,-36.3 v1(-1.778,-35.05)
  Top Layer w0.356: P_L4.1 -4.375,-38.227
  Bottom Layer w0.3: v1(-1.778,-35.05) -0.938,-34.21 -0.938,-34.085 -0.127,-33.274 5.308,-33.274 5.99,-32.592 5.99,-31.61 Bank_C.46
NetBank_C_48: Bank_C.48 P_L2.1 | length 8.3
  Top Layer w0.356: v2(7.087,-27.483) 7.18,-27.483 7.749,-26.914 7.884,-26.914 8.382,-26.416 P_L2.1
  Bottom Layer w0.3: Bank_C.48 5,-29.29 5.334,-28.956
  Bottom Layer w0.356: 5.334,-28.956 6.741,-27.549 7.021,-27.549 v2(7.087,-27.483)
NetBank_C_49: Bank_C.49 P_L3.1 | length 15.5
  Top Layer w0.356: v2(5,-28.088) 6.536,-28.088 7.044,-28.596 8.488,-28.596 9.906,-27.178 13.208,-27.178 14.292,-26.094 14.292,-25.459 P_L3.1
  Bottom Layer w0.3: Bank_C.49 4.5,-28.956
  Bottom Layer w0.356: 4.5,-28.956 4.5,-28.682 5,-28.182 v2(5,-28.088)
pads on no net: Bank_A.1 Bank_A.7 Bank_A.11 Bank_A.12 Bank_A.13 Bank_A.14 Bank_A.15 Bank_A.17 Bank_A.18 Bank_A.19 Bank_A.20 Bank_A.21 Bank_A.23 Bank_A.24 Bank_A.26 Bank_A.30 Bank_A.31 Bank_A.32 Bank_A.33 Bank_A.34 Bank_A.36 Bank_A.37 Bank_A.38 Bank_A.39 Bank_A.40 Bank_A.44 Bank_A.50 Bank_B.8 Bank_B.9 Bank_B.11 Bank_B.12 Bank_B.14 Bank_B.15 Bank_B.25 Bank_B.26 Bank_B.30 Bank_B.31 Bank_B.33 Bank_B.34 Bank_B.36 Bank_B.37 Bank_B.39 Bank_B.40 Bank_B.42 Bank_B.43 Bank_C.1 Bank_C.7 Bank_C.11 Bank_C.12 Bank_C.13 Bank_C.14 Bank_C.15 Bank_C.17 Bank_C.18 Bank_C.19 Bank_C.20 Bank_C.21 Bank_C.23 Bank_C.24 Bank_C.25 Bank_C.26 Bank_C.27 Bank_C.28 Bank_C.30 Bank_C.31 Bank_C.32 Bank_C.33 Bank_C.34 Bank_C.36 Bank_C.37 Bank_C.38 Bank_C.39 Bank_C.40 Bank_C.44 Bank_C.50 Bank_D.1 Bank_D.2 Bank_D.3 Bank_D.5 Bank_D.6 Bank_D.7 Bank_D.8 Bank_D.9 Bank_D.11 Bank_D.12 Bank_D.13 Bank_D.14 Bank_D.15 Bank_D.17 Bank_D.18 Bank_D.19 Bank_D.20 Bank_D.21 Bank_D.23 Bank_D.24 Bank_D.25 Bank_D.26 Bank_D.27 Bank_D.28 Bank_D.30 Bank_D.31 Bank_D.32 Bank_D.33 Bank_D.34 Bank_D.36 Bank_D.37 Bank_D.38 Bank_D.39 Bank_D.40 Bank_D.42 Bank_D.43 Bank_D.44 Bank_D.45 Bank_D.46 Bank_D.48 Bank_D.49 Bank_D.50
copper on no net:
  other v4: 3.05,-35.05 16.95,-35.05 24.55,-35.05 38.45,-35.05 3.05,-32.55 16.95,-32.55 24.55,-32.55 38.45,-32.55 24.55,0.95 38.45,0.95 -0.959,0.999 12.941,0.999 24.55,3.45 38.45,3.45 -0.959,3.499 12.941,3.499

## Polygon pours and split planes (outlines as drawn)
GND on Bottom Layer "bot_gnd" (solid, remove dead copper, pour order 1): -10.033,-47.879 -10.033,16.002 55.499,16.002 55.499,-47.879
GND on Top Layer "top_gnd" (solid, remove dead copper, pour order 0): -10.033,-47.879 -10.033,16.002 55.499,16.002 55.499,-47.879

## Silkscreen, mask and mechanical layers (free items; w line width, h text height)
Top Overlay:
  lines w0.5: -9.196,-18.288 -9.196,-3.982 -7.5,-2.286 9.271,-2.286 10.852,-3.867 10.852,-10.16 ; -9.144,-18.296 16.51,-18.296 16.51,-11.684 15.113,-10.287 ; -9.078,-46.863 -9.078,-22.088 -7.315,-20.325 15.525,-20.325 ; -9.007,-46.868 17.018,-46.868 ; 10.922,-10.295 15.001,-10.295 ; 15.618,-20.346 17.072,-21.8 17.072,-46.863 ; 19.939,-23.266 19.939,-16.637 21.201,-15.375 52.85,-15.375 54.225,-16.75 54.225,-23.368 ; 20.002,-23.5 54.229,-23.5 ; 21.844,15.621 21.971,15.621 23.425,14.167 23.425,7.364 -9.45,7.239 -9.45,13.925 -7.725,15.65 21.875,15.65 ; 29.784,-46.949 29.784,-40.249 31.484,-38.549 ; 29.896,-46.995 38.862,-46.995 ; 31.547,-38.486 37.465,-38.486 ; 37.393,-38.571 38.847,-40.025 38.847,-46.828 ; 51.768,15.704 53.222,14.25 53.222,-10.414 25.2,-10.414 25.2,14 26.9,15.7 51.8,15.7
M1_BoardOutline:
  the board outline again, w0.5
M12_titleBlock:
  lines w0.127: -76.924,-137.352 -76.924,55.688 ; -76.924,-89.092 -71.844,-89.092 ; -76.924,-40.832 -71.844,-40.832 ; -76.924,7.428 -71.844,7.428 ; -71.844,-132.272 -71.844,50.608 ; 60.006,-101.805 96.582,-101.805 ; 60.236,-101.792 60.236,-132.272 95.796,-132.272 ; 69.126,-137.352 69.126,-132.272 ; 96.533,-124.652 210.096,-124.652 ; 96.533,-117.032 210.096,-117.032 ; 96.533,-109.412 133.896,-109.412 ; 133.896,-132.272 133.896,-117.032 133.896,-101.792 ; 142.151,-137.352 142.151,-132.272 ; 142.151,50.608 142.151,55.688 ; 187.236,-132.272 187.236,-117.032 ; 210.096,-89.092 215.176,-89.092 ; 210.096,-40.832 215.176,-40.832 ; 210.096,7.428 215.176,7.428 ; 210.096,50.608 210.096,-132.272 ; 215.176,-137.352 215.176,55.688 ; 133.896,-101.792 210.096,-101.792 210.096,-132.272 ; 133.896,-101.792 96.533,-101.792 96.533,-132.272 210.096,-132.272
  lines w0.254: 162.89,-101.17 162.89,48.69 ; 162.89,-10.948 208.61,-10.948 208.61,-8.408 208.61,10.59 ; 162.89,10.59 208.61,10.59 ; 162.89,15.67 208.61,15.67 208.61,10.59
  text "1" at -40.678,52.259 h0.8
  text "3" at 105.118,52.259 h0.8
  text "4" at 178.016,52.259 h0.8
  text "A" at -75.019,29.246 h0.8
  text "A" at 212.001,29.246 h0.8
  text "Abstand von Frontpanelkante" at 165.43,23.29 h0.8
  text "links unten zum Nullpunkt:" at 165.43,20.75 h0.8
  text "13,9mm" at 165.43,18.21 h0.8
  text "Mechanical Layer Definitionen:" at 165.43,11.912 h0.8
  text "M1_boardOutline" at 165.43,8.05 h0.8
  text "M11_text_topL" at 165.43,4.292 h0.8
  text "M12_titleBlock" at 165.43,1.752 h0.8
  text "M13_3D_topL" at 165.43,-0.788 h0.8
  text "M14_3D_botL" at 165.43,-3.328 h0.8
  text "M15_courtyard_topL" at 165.43,-5.584 h0.8
  text "M16_courtyard_botL" at 165.43,-8.124 h0.8
  text "B" at -75.019,-18.811 h0.8
  text "B" at 212.001,-18.811 h0.8
  text "C" at -75.019,-67.325 h0.8
  text "C" at 212.001,-67.325 h0.8
  text "ENGINEER:" at 97.066,-104.332 h0.8
  text "TITLE:" at 135.166,-104.332 h0.8
  text "PCB DESIGNER:" at 97.066,-111.825 h0.8
  text "D" at -75.019,-115.331 h0.8
  text "D" at 212.001,-115.331 h0.8
  text "EMBL - European" at 55.258,-117.998 h0.8
  text "DATE:" at 97.066,-119.572 h0.8
  text "PART NO.:" at 135.166,-119.572 h0.8
  text "REV:" at 188.506,-119.572 h0.8
  text "Molecular Biology Laboratory" at 61.608,-120.538 h0.8
  text "Meyerhofstrasse 1" at 61.608,-122.443 h0.8
  text ".Print_Date" at 98.336,-122.62 h0.8
  text "69117 Heidelberg" at 61.608,-125.618 h0.8
  text "FILE NAME:" at 97.066,-127.192 h0.8
  text "DWG NO:" at 135.166,-127.192 h0.8
  text "SCALE:" at 188.506,-127.192 h0.8
  text "Germany" at 61.608,-128.475 h0.8
  text ".PCB_FILE_NAME_NO_PATH" at 98.336,-130.24 h0.8
  text "1" at -40.678,-135.701 h0.8
  text "3" at 105.118,-135.701 h0.8
  text "4" at 178.016,-135.701 h0.8